# Altium PCB PCB1.PcbDoc (part 2 of 3)
Units mm, origin at the board's own origin, x right, y up, seen from the top; angles counter-clockwise.
Board outline 44.56 x 41.5 mm, 2 copper layers (Top Layer, Bottom Layer), stack 0.235 mm thick; 45 components, 47 nets, 215 pads, 58 vias.
Unrouted connection lines stored in the file: 2.
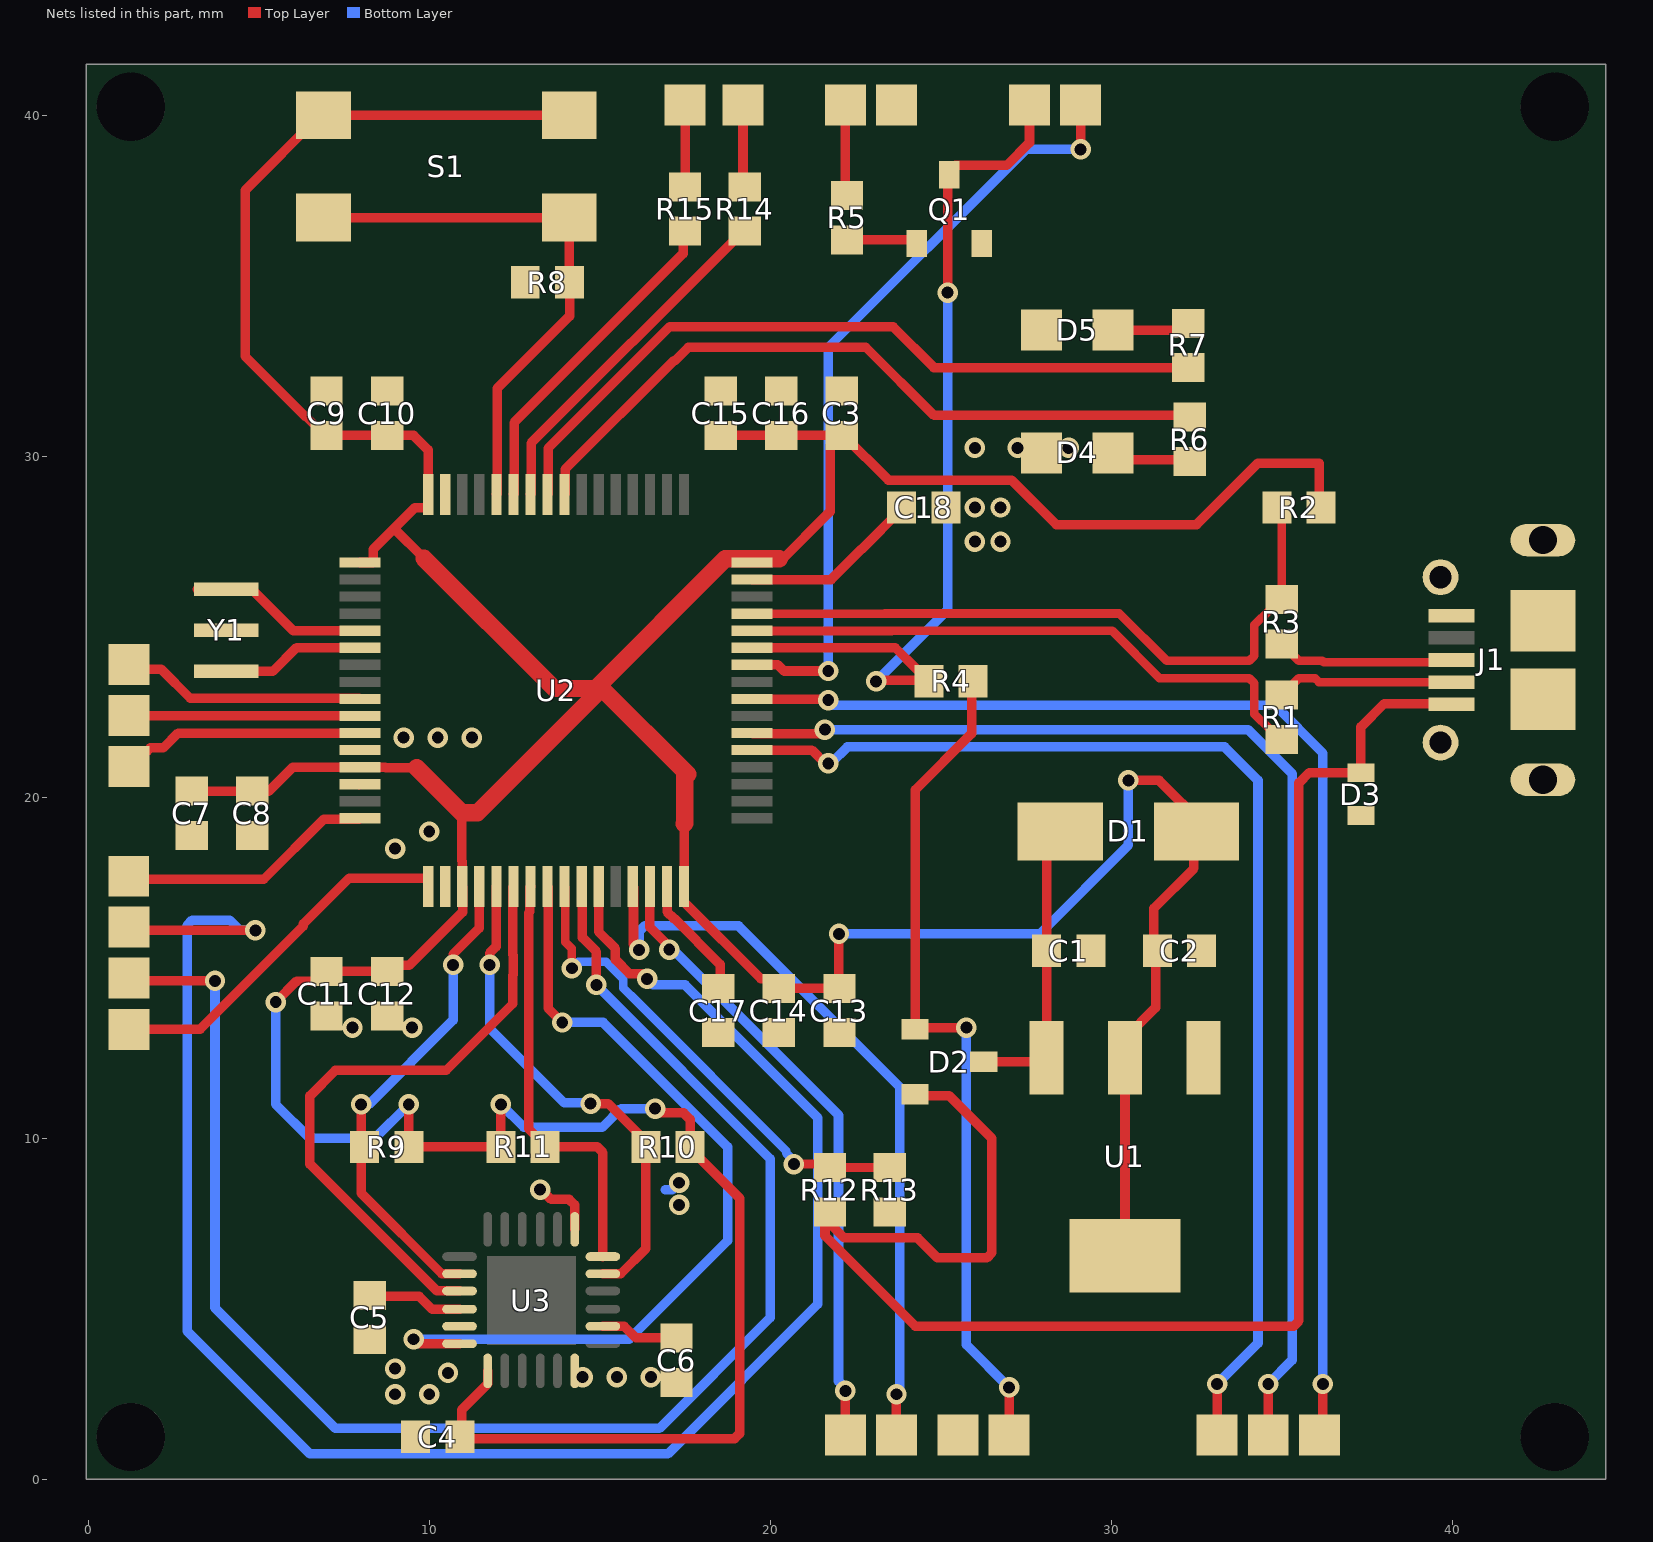
[diagram p2: the nets of this part, all layers, seen from the top]

## Part data
C1 C2 C9 C11 C13 C15: library part CC0603MRX5R7BB106, "10 µF ±20% 16V Ceramic Capacitor X5R 0603 (1608 Metric)", Capacitance=100nF, Case Code (Metric)=1608, Case Code (Imperial)=0603, Dielectric=X7R, Dielectric Material=Ceramic, Manufacturer=KEMET, Manufacturer Part Number=C0603C104K5RAC7411, Max Operating Temperature=125°C, Min Operating Temperature=-55°C, Package Quantity=15000, Supplier Part Number 1=399-7374-2-ND, Tolerance=10%, Voltage Rating=50V, Case/Package=0603, Category="Ceramic Capacitors", ComponentLink1Description=https://datasheet.ciiva.com/5424/kem-c1002-x7r-smd-5424426.pdf?src-supplier=Mouser, ComponentLink1URL=https://datasheet.ciiva.com/5424/kem-c1002-x7r-smd-5424426.pdf?src-supplier=Mouser, ComponentLink2Description=http://www.mouser.com/ds/2/447/Yageo_UPY-GP_NP0_16V-to-50V_9-358835.pdf?src-supplier=Mouser, ComponentLink2URL=http://www.mouser.com/ds/2/447/Yageo_UPY-GP_NP0_16V-to-50V_9-358835.pdf?src-supplier=Mouser, ComponentLink3Description=http://www.yageo.com/documents/recent/UPY-GPHC_X5R_4V-to-50V_25.pdf?src-supplier=Digi-Key, ComponentLink3URL=http://www.yageo.com/documents/recent/UPY-GPHC_X5R_4V-to-50V_25.pdf?src-supplier=Digi-Key, Depth=0.8mm, Dissipation Factor=2.5%, Halogen Free="Halogen Free", Height=0.8mm, Lead Free="Lead Free", Lead Pitch=0.7mm, Length=1.6mm, Mount="Surface Mount", Packaging="Tape and Reel", Pricing 1="15000=0,01540, 30000=0,01463, 75000=0,01309, 105000=0,01059, 150000=0,01024, 375000=0,00963 (USD)", Pricing 2="1=0,45000, 10=0,31500, 50=0,22080, 100=0,18930, 500=0,14194, 1000=0,11986 (USD)", Radiation Hardening=No, RoHS=Yes, RoHS Compliant=Yes, Stock 1=3300000, Stock 2=3575, Supplier 1=Digi-Key, Supplier 2=Digi-Key, Supplier Part Number 2=311-1822-1-ND, Termination=SMD/SMT, Thickness=0.035inch, Voltage Rating (DC)=50V, Weight=7.1E-05oz, Width=0.031inch
C3 C4 C5 C8 C10 C12 C14 C16 C17 C18: library part C0603C104K5RAC7411, "Cap Ceramic 0.1uF 50V X7R 10% SMD 0603 125°C Paper T/R 100nF", Case Code (Metric)=1608, Case Code (Imperial)=0603, Dielectric=X7R, Dielectric Material=Ceramic, Manufacturer=KEMET, Max Operating Temperature=125°C, Min Operating Temperature=-55°C, Package Quantity=15000, Supplier Part Number 1=399-7374-2-ND, Tolerance=10%, Voltage Rating=50V, Capacitance=100nF, Case/Package=0603, Category="Ceramic Capacitors", ComponentLink1Description=https://datasheet.ciiva.com/5424/kem-c1002-x7r-smd-5424426.pdf?src-supplier=Mouser, ComponentLink1URL=https://datasheet.ciiva.com/5424/kem-c1002-x7r-smd-5424426.pdf?src-supplier=Mouser, Depth=0.8mm, Dissipation Factor=2.5%, Height=0.8mm, Lead Pitch=0.7mm, Length=1.6mm, Manufacturer Part Number=C0603C104K5RAC7411, Mount="Surface Mount", Packaging="Tape and Reel", Pricing 1="15000=0,01540, 30000=0,01463, 75000=0,01309, 105000=0,01059, 150000=0,01024, 375000=0,00963 (USD)", Radiation Hardening=No, RoHS=Yes, Stock 1=3300000, Supplier 1=Digi-Key, Termination=SMD/SMT, Thickness=0.035inch, Voltage Rating (DC)=50V, Width=0.031inch
C6: library part 0603YC222KAT2A, "2200 pF ±10% 16V Ceramic Capacitor X7R 0603 (1608 Metric) 2.2nF", Capacitance=100nF, Case Code (Metric)=1608, Case Code (Imperial)=0603, Dielectric=X7R, Dielectric Material=Ceramic, Manufacturer=KEMET, Manufacturer Part Number=C0603C104K5RAC7411, Max Operating Temperature=125°C, Min Operating Temperature=-55°C, Package Quantity=15000, Supplier Part Number 1=399-7374-2-ND, Tolerance=10%, Voltage Rating=50V, Case/Package=0603, Category="Ceramic Capacitors", ComponentLink1Description=https://datasheet.ciiva.com/5424/kem-c1002-x7r-smd-5424426.pdf?src-supplier=Mouser, ComponentLink1URL=https://datasheet.ciiva.com/5424/kem-c1002-x7r-smd-5424426.pdf?src-supplier=Mouser, ComponentLink2Description=https://datasheet.ciiva.com/150/cx7r-150288.pdf?src-supplier=Digi-Key, ComponentLink2URL=https://datasheet.ciiva.com/150/cx7r-150288.pdf?src-supplier=Digi-Key, ComponentLink3Description=https://datasheet.ciiva.com/150/cx7r-150289.pdf?src-supplier=Digi-Key, ComponentLink3URL=https://datasheet.ciiva.com/150/cx7r-150289.pdf?src-supplier=Digi-Key, ComponentLink4Description=https://datasheet.ciiva.com/5412/cx7r-218113-5412506.pdf?src-supplier=Mouser, ComponentLink4URL=https://datasheet.ciiva.com/5412/cx7r-218113-5412506.pdf?src-supplier=Mouser, ComponentLink5Description=https://datasheet.ciiva.com/22682/1679506-22682859.pdf?src-supplier=Element14, ComponentLink5URL=https://datasheet.ciiva.com/22682/1679506-22682859.pdf?src-supplier=Element14, ComponentLink6Description=https://datasheet.ciiva.com/28546/1679506-28546235.pdf?src-supplier=Element14, ComponentLink6URL=https://datasheet.ciiva.com/28546/1679506-28546235.pdf?src-supplier=Element14, ComponentLink7Description=https://datasheet.ciiva.com/16199/cx7r-16199340.pdf?src-supplier=Future+Electronics, ComponentLink7URL=https://datasheet.ciiva.com/16199/cx7r-16199340.pdf?src-supplier=Future+Electronics, ComponentLink8Description=https://datasheet.ciiva.com/150/cx7r-150287.pdf?src-supplier=Digi-Key, ComponentLink8URL=https://datasheet.ciiva.com/150/cx7r-150287.pdf?src-supplier=Digi-Key, Construction=Flat, Contact Plating=Tin,Matte, Depth=0.8mm, Dissipation Factor=2.5%, Height=0.8mm, Lead Free="Lead Free", Lead Pitch=0.7mm, Length=1.6mm, Mount="Surface Mount", Number of Pins=2, Packaging="Tape and Reel", Pricing 1="15000=0,01540, 30000=0,01463, 75000=0,01309, 105000=0,01059, 150000=0,01024, 375000=0,00963 (USD)", Pricing 2="1=0,10000, 10=0,06500, 50=0,03560, 100=0,02910, 500=0,02080, 1000=0,01634 (USD)", Radiation Hardening=No, REACH SVHC="No SVHC", RoHS=Yes, RoHS Compliant=Yes, Series=-, Stock 1=3300000, Stock 2=82908, Supplier 1=Digi-Key, Supplier 2=Digi-Key, Supplier Part Number 2=478-6210-1-ND, Termination=SMD/SMT, Thickness=0.035inch, Voltage Rating (DC)=50V, Width=0.031inch
C7: library part CC0603MRX5R7BB105, "Cap Ceramic 1uF 16V X5R 20% Pad SMD 0603 85C Automotive T/R", Capacitance=100nF, Case Code (Metric)=1608, Case Code (Imperial)=0603, Dielectric=X7R, Dielectric Material=Ceramic, Manufacturer=KEMET, Manufacturer Part Number=C0603C104K5RAC7411, Max Operating Temperature=125°C, Min Operating Temperature=-55°C, Package Quantity=15000, Supplier Part Number 1=399-7374-2-ND, Tolerance=10%, Voltage Rating=50V, Case/Package=0603, Category="Ceramic Capacitors", ComponentLink1Description=https://datasheet.ciiva.com/5424/kem-c1002-x7r-smd-5424426.pdf?src-supplier=Mouser, ComponentLink1URL=https://datasheet.ciiva.com/5424/kem-c1002-x7r-smd-5424426.pdf?src-supplier=Mouser, ComponentLink2Description=http://www.mouser.com/ds/2/447/Yageo_UPY-GP_NP0_16V-to-50V_9-358835.pdf?src-supplier=Mouser, ComponentLink2URL=http://www.mouser.com/ds/2/447/Yageo_UPY-GP_NP0_16V-to-50V_9-358835.pdf?src-supplier=Mouser, ComponentLink3Description=http://www.yageo.com/documents/recent/UPY-GPHC_X5R_4V-to-50V_25.pdf?src-supplier=Digi-Key, ComponentLink3URL=http://www.yageo.com/documents/recent/UPY-GPHC_X5R_4V-to-50V_25.pdf?src-supplier=Digi-Key, ComponentLink4Description=http://www.mouser.com/ds/2/447/UPY-GPHC_X5R_4V-to-50V_25-1131599.pdf?src-supplier=Mouser, ComponentLink4URL=http://www.mouser.com/ds/2/447/UPY-GPHC_X5R_4V-to-50V_25-1131599.pdf?src-supplier=Mouser, ComponentLink5Description=http://www.yageo.com/exep/pages/download/literatures/ProductSelectionGuide%202014_Final_2.pdf?src-supplier=Digi-Key, ComponentLink5URL=http://www.yageo.com/exep/pages/download/literatures/ProductSelectionGuide%202014_Final_2.pdf?src-supplier=Digi-Key, Depth=0.8mm, Dissipation Factor=2.5%, Halogen Free="Halogen Free", Height=0.8mm, Lead Free="Lead Free", Lead Pitch=0.7mm, Length=1.6mm, Mount="Surface Mount", Packaging="Tape and Reel", Pricing 1="15000=0,01540, 30000=0,01463, 75000=0,01309, 105000=0,01059, 150000=0,01024, 375000=0,00963 (USD)", Pricing 2="1=0,45000, 10=0,31500, 50=0,22080, 100=0,18930, 500=0,14194, 1000=0,11986 (USD)", Pricing 3="1=0,11000, 10=0,08000, 50=0,04560, 100=0,03780, 500=0,02648, 1000=0,02191 (USD)", Radiation Hardening=No, Resistor Type=Ceramic, RoHS=Yes, RoHS Compliant=Yes, Series=CC, Stock 1=3300000, Stock 2=3575, Stock 3=9457, Supplier 1=Digi-Key, Supplier 2=Digi-Key, Supplier 3=Digi-Key, Supplier Part Number 2=311-1822-1-ND, Supplier Part Number 3=311-1821-1-ND, Termination=SMD/SMT, Thickness=0.035inch, Voltage Rating (DC)=50V, Weight=7.1E-05oz, Width=0.031inch
D1: "VR=50V IF=1A 10pF Trr=3us", Average Rectified Current=1A, Capacitance=10pF, Case/Package=SMA, Forward Voltage=1.1V, Manufacturer=Diodes, Manufacturer Part Number=S1A-13-F, Max Forward Surge Current (Ifsm)=30A, Max Operating Temperature=150°C, Max Repetitive Reverse Voltage (Vrrm)=50V, Max Reverse Current=5uA, Min Operating Temperature=-65°C, Package Quantity=5000, Supplier Part Number 1=S1A-FDICT-ND, Category="Rectifier Diodes", ComponentLink1Description=https://datasheet.ciiva.com/911/ds16003-911872.pdf?src-supplier=Digi-Key, ComponentLink1URL=https://datasheet.ciiva.com/911/ds16003-911872.pdf?src-supplier=Digi-Key, ComponentLink2Description=https://datasheet.ciiva.com/27052/1541520-27052419.pdf?src-supplier=Jameco, ComponentLink2URL=https://datasheet.ciiva.com/27052/1541520-27052419.pdf?src-supplier=Jameco, ComponentLink3Description=https://datasheet.ciiva.com/8301/ds16003-8301429.pdf?src-supplier=Avnet, ComponentLink3URL=https://datasheet.ciiva.com/8301/ds16003-8301429.pdf?src-supplier=Avnet, ComponentLink4Description=https://datasheet.ciiva.com/22695/1911706-22695830.pdf?src-supplier=Element14, ComponentLink4URL=https://datasheet.ciiva.com/22695/1911706-22695830.pdf?src-supplier=Element14, ComponentLink5Description=https://datasheet.ciiva.com/4453/ds16003-83672-4453580.pdf?src-supplier=Mouser, ComponentLink5URL=https://datasheet.ciiva.com/4453/ds16003-83672-4453580.pdf?src-supplier=Mouser, ComponentLink6Description=https://datasheet.ciiva.com/16199/ds16003-16199336.pdf?src-supplier=Future+Electronics, ComponentLink6URL=https://datasheet.ciiva.com/16199/ds16003-16199336.pdf?src-supplier=Future+Electronics, ComponentLink7Description=https://datasheet.ciiva.com/25953/ds16003-25953033.pdf?src-supplier=Avnet+Europe, ComponentLink7URL=https://datasheet.ciiva.com/25953/ds16003-25953033.pdf?src-supplier=Avnet+Europe, Current Rating=1A, Element Configuration=Single, Forward Current=1A, Height=2.1mm, Lead Free="Lead Free", Length=4.6mm, Max Reverse Voltage (DC)=50V, Max Surge Current=30A, Mount="Surface Mount", Number of Pins=2, Output Current=1A, Packaging="Tape and Reel", Peak Non-Repetitive Surge Current=30A, Polarity=Standard, Pricing 1="1=0,27000, 10=0,22300, 100=0,11850, 500=0,07796, 1000=0,05301, 2000=0,04782 (USD)", Radiation Hardening=No, REACH SVHC="No SVHC", Recovery Time=1.8us, Reverse Recovery Time=3us, Reverse Voltage (DC)=50V, RoHS=Yes, RoHS Compliant=Yes, Series=-, Stock 1=971381, Supplier 1=Digi-Key, Termination=SMD/SMT, Voltage Rating (DC)=50V, Weight=0.002258oz, Width=2.92mm
D2: "Diode Array 1 Pair Common Cathode Schottky 30V 200mA Surface Mount TO-236-3, SC-59, SOT-23-3", Package="SOT-23-3 ON Semiconductor", Availability=Unavailable, MF="ON Semiconductor", MP=BAT54C, Price=None, SnapEDA_Link=https://www.snapeda.com/parts/BAT54C/ON%20Semiconductor/view-part/1985258/?ref=snap
D3: "ESDA Series 6.4 V 700 W SMT Uni-Directional TVS Diode - 1610", Case/Package=1610, Clamping Voltage=11.6V, Manufacturer=STMicroelectronics, Max Breakdown Voltage=7.2V, Max Operating Temperature=150°C, Min Breakdown Voltage=6.4V, Min Operating Temperature=-55°C, Peak Pulse Current=60A, Peak Pulse Power=700W, Power Line Protection=No, Resistor Type=Zener, Reverse Standoff Voltage=5V, Supplier Part Number 1=497-16253-1-ND, Category="TVS Diodes", ComponentLink1Description=http://www.farnell.com/datasheets/2041290.pdf?src-supplier=Farnell, ComponentLink1URL=http://www.farnell.com/datasheets/2041290.pdf?src-supplier=Farnell, ComponentLink2Description=http://www.st.com/content/ccc/resource/technical/document/datasheet/44/e9/26/44/42/ee/4f/e5/DM00139972.pdf/files/DM00139972.pdf/jcr:content/translations/en.DM00139972.pdf?src-supplier=Digi-Key, ComponentLink2URL=http://www.st.com/content/ccc/resource/technical/document/datasheet/44/e9/26/44/42/ee/4f/e5/DM00139972.pdf/files/DM00139972.pdf/jcr:content/translations/en.DM00139972.pdf?src-supplier=Digi-Key, ComponentLink3Description=http://www.farnell.com/datasheets/2041290.pdf?src-supplier=Element14, ComponentLink3URL=http://www.farnell.com/datasheets/2041290.pdf?src-supplier=Element14, Manufacturer Part Number=ESDA7P60-1U1M, Mount="Surface Mount", Number of Pins=2, Number of Unidirectional Channels=1, Packaging="Cut Tape", Polarity=Unidirectional, Pricing 1="1=0,51000, 10=0,38400, 100=0,23910, 500=0,16360, 1000=0,12584, 2000=0,11326 (USD)", REACH SVHC="No SVHC", RoHS=Yes, RoHS Compliant=Yes, Stock 1=12994, Supplier 1=Digi-Key
D4 D5: "Led SMT Red 0805 Tape", Case Code (Metric)=2012, Case Code (Imperial)=0805, Color=Red, Forward Current=25mA, Forward Voltage=2.5V, Lens Color=White, Manufacturer="Osram Opto", Manufacturer Part Number=LSR976-NR-1, Max Operating Temperature=85°C, Min Operating Temperature=-30°C, Package Quantity=16000, Power Dissipation=65mW, Reverse Voltage=12V, Supplier Part Number 1=475-1278-1-ND, Test Current=20mA, Case/Package=0805, Category=LEDs, ComponentLink1Description=https://datasheet.ciiva.com/4688/o-ls-ly-r976-24152-4688435.pdf?src-supplier=Mouser, ComponentLink1URL=https://datasheet.ciiva.com/4688/o-ls-ly-r976-24152-4688435.pdf?src-supplier=Mouser, ComponentLink2Description=https://datasheet.ciiva.com/26920/getdatasheetpartid-568367-26920831.pdf?src-supplier=Verical, ComponentLink2URL=https://datasheet.ciiva.com/26920/getdatasheetpartid-568367-26920831.pdf?src-supplier=Verical, ComponentLink3Description=https://datasheet.ciiva.com/2112/00078896-0-2112782.pdf?src-supplier=Digi-Key, ComponentLink3URL=https://datasheet.ciiva.com/2112/00078896-0-2112782.pdf?src-supplier=Digi-Key, ComponentLink4Description=https://datasheet.ciiva.com/2112/00078896-0-2112781.pdf?src-supplier=Digi-Key, ComponentLink4URL=https://datasheet.ciiva.com/2112/00078896-0-2112781.pdf?src-supplier=Digi-Key, ComponentLink5Description=https://datasheet.ciiva.com/2112/00078896-0-2112783.pdf?src-supplier=Digi-Key, ComponentLink5URL=https://datasheet.ciiva.com/2112/00078896-0-2112783.pdf?src-supplier=Digi-Key, Depth=1.35mm, Dominant Wavelength=633nm, Height=0.9mm, Length=2.1mm, Lens Size=1.25mm, Lens Style=Flat,Diffused,Colorless,Rectangular, Lens Transparency=Diffused, Luminous Flux=0.47lm, Luminous Intensity=180mcd, Mount="Surface Mount", Number of Elements=1, Number of LEDs=1, Number of Pins=2, Packaging="Tape and Reel", Pricing 1="1=0,31000, 10=0,16700, 100=0,07750, 500=0,07152, 1000=0,05602, 2000=0,05483 (USD)", Radiation Hardening=No, RoHS=Yes, RoHS Compliant=Yes, Series="CHIPLED 0805", Stock 1=165904, Supplier 1=Digi-Key, Viewing Angle=160°, Width=1.25mm, Illumination Color=Red
J1: "Conn Micro USB 2.0 Type B RCP 5 POS 0.65mm Solder RA SMD 5 Terminal 1 Port Embossed T/R", Package="FakePackage u", Availability=Unavailable, MF=Hirose, MP=ZX62D-B-5P8, Price=None, SnapEDA_Link=https://www.snapeda.com/parts/ZX62D-B-5P8/Hirose%20Electric%20Co%20Ltd/view-part/46842/?ref=snap
Q1: "General Purpose Transistor, PNP Silicon, 3-Pin SOT-23, Pb-Free, Tape and Reel", Manufacturer="On Semiconductor", ComponentLink1Description="Manufacturer URL", ComponentLink1URL=http://www.onsemi.com/, ComponentLink2Description=Datasheet, ComponentLink2URL=http://www.onsemi.cn/pub_link/Collateral/BC856ALT1-D.PDF, ComponentLink3Description="Package Specification", ComponentLink3URL=http://www.onsemi.cn/pub_link/Collateral/318-08.PDF, DatasheetVersion="Rev. 13", fT Min (MHz)=100, Mounting Technology="Surface Mount", PackageDescription="3-Pin Small Outline Transistor, Body 2.92 x 1.3 mm, Pitch 0.95 mm", PackageReference=SOT-23-3-318-08, PackageVersion="Rev. AP, 11/2009", Packing="Tape and Reel", PartNumber=BC857BLT3G, Polarity=PNP, RoHS=TRUE, IC Continuous (A)=-0.1
R1 R3: library part RC0603JR-0722RL, "22 Ohms ±5% 0.1W, 1/10W Chip Resistor 0603 (1608 Metric) Moisture Resistant Thick Film", Case Code (Metric)=1005, Case Code (Imperial)=0402, Manufacturer=Yageo, Manufacturer Part Number=RC0402JR-071K2L, Max Operating Temperature=155°C, Max Power Dissipation=63mW, Min Operating Temperature=-55°C, Package Quantity=1, Power Rating=62.5mW, Resistance=1.2kR, Resistance Tolerance=5%, Resistor Type="Thick Film", Supplier Part Number 1=311-1.2KGRCT-ND, Temperature Coefficient=100ppm/°C, Voltage Rating=50V, Case/Package=0402, Category="Chip SMD Resistors", ComponentLink1Description=https://datasheet.ciiva.com/7983/1018594-7983557.pdf?src-supplier=Element14, ComponentLink1URL=https://datasheet.ciiva.com/7983/1018594-7983557.pdf?src-supplier=Element14, ComponentLink2Description=https://datasheet.ciiva.com/12558/pyu-rc0402-51-rohs-l-6-r-8721-12558349.pdf?src-supplier=Mouser, ComponentLink2URL=https://datasheet.ciiva.com/12558/pyu-rc0402-51-rohs-l-6-r-8721-12558349.pdf?src-supplier=Mouser, ComponentLink3Description=https://datasheet.ciiva.com/7850/1018594-7850165.pdf?src-supplier=Element14, ComponentLink3URL=https://datasheet.ciiva.com/7850/1018594-7850165.pdf?src-supplier=Element14, ComponentLink4Description=https://datasheet.ciiva.com/15189/getdatasheetpartid-325064-15189548.pdf?src-supplier=Verical, ComponentLink4URL=https://datasheet.ciiva.com/15189/getdatasheetpartid-325064-15189548.pdf?src-supplier=Verical, ComponentLink5Description=https://datasheet.ciiva.com/17068/pyu-rc0402-51-rohs-l-6-r-17068326.pdf?src-supplier=Future+Electronics, ComponentLink5URL=https://datasheet.ciiva.com/17068/pyu-rc0402-51-rohs-l-6-r-17068326.pdf?src-supplier=Future+Electronics, ComponentLink6Description=https://datasheet.ciiva.com/2452/pyu-r-int-thick-7-2452873.pdf?src-supplier=Digi-Key, ComponentLink6URL=https://datasheet.ciiva.com/2452/pyu-r-int-thick-7-2452873.pdf?src-supplier=Digi-Key, ComponentLink7Description=https://datasheet.ciiva.com/2452/pyu-r-int-thick-7-2452874.pdf?src-supplier=Digi-Key, ComponentLink7URL=https://datasheet.ciiva.com/2452/pyu-r-int-thick-7-2452874.pdf?src-supplier=Digi-Key, ComponentLink8Description=https://datasheet.ciiva.com/2452/pyu-r-int-thick-7-2452872.pdf?src-supplier=Digi-Key, ComponentLink8URL=https://datasheet.ciiva.com/2452/pyu-r-int-thick-7-2452872.pdf?src-supplier=Digi-Key, ComponentLink9Description=https://datasheet.ciiva.com/7746/443971-7746456.pdf?src-supplier=Element14, ComponentLink9URL=https://datasheet.ciiva.com/7746/443971-7746456.pdf?src-supplier=Element14, ComponentLink10Description=https://datasheet.ciiva.com/7746/443971-7746455.pdf?src-supplier=Element14, ComponentLink10URL=https://datasheet.ciiva.com/7746/443971-7746455.pdf?src-supplier=Element14, ComponentLink11Description=https://datasheet.ciiva.com/22643/443971-22643423.pdf?src-supplier=Element14, ComponentLink11URL=https://datasheet.ciiva.com/22643/443971-22643423.pdf?src-supplier=Element14, ComponentLink12Description=https://datasheet.ciiva.com/46394/443971-46394999.pdf?src-supplier=Element14, ComponentLink12URL=https://datasheet.ciiva.com/46394/443971-46394999.pdf?src-supplier=Element14, ComponentLink13Description=https://datasheet.ciiva.com/7746/443971-7746471.pdf?src-supplier=Element14, ComponentLink13URL=https://datasheet.ciiva.com/7746/443971-7746471.pdf?src-supplier=Element14, ComponentLink14Description=https://datasheet.ciiva.com/7746/443971-7746472.pdf?src-supplier=Element14, ComponentLink14URL=https://datasheet.ciiva.com/7746/443971-7746472.pdf?src-supplier=Element14, ComponentLink15Description=https://datasheet.ciiva.com/15189/getdatasheetpartid-493085-15189862.pdf?src-supplier=Verical, ComponentLink15URL=https://datasheet.ciiva.com/15189/getdatasheetpartid-493085-15189862.pdf?src-supplier=Verical, Construction=Rectangular, Contact Plating=Tin,Lead,Matte, Depth=0.5mm, Features="Moisture Resistant", Height=0.35mm, Lead Free="Lead Free", Length=1mm, Military Standard=Not, Number of Pins=2, Number of Terminations=2, Packaging="Tape and Reel", Pricing 1="1=0,10000, 10=0,01300, 100=0,00540, 1000=0,00244, 2500=0,00212, 5000=0,00175 (USD)", Pricing 2="1=0,10000, 10=0,02000, 100=0,00800, 1000=0,00360, 2500=0,00312, 5000=0,00258 (USD)", Pricing 3="1=0,10000, 10=0,02000, 100=0,00800, 1000=0,00360, 2500=0,00312 (USD)", Radiation Hardening=No, REACH SVHC="No SVHC", RoHS=Yes, RoHS Compliant=Yes, Series=RC, Size Code=0402, Stock 1=52843, Stock 2=41751, Stock 3=810575, Supplier 1=Digi-Key, Supplier 2=Digi-Key, Supplier 3=Digi-Key, Supplier Part Number 2=13-RC0603JR-131KLCT-ND, Supplier Part Number 3=311-22GRCT-ND, Termination=SMD/SMT, Tolerance=5%, Voltage Rating (DC)=50V, Width=0.5mm
R2: library part RC0603FR-071K5L, "1500Ω ± 1.00% 0.1W ± 100ppm/℃ 0603", Case Code (Metric)=1608, Case Code (Imperial)=0603, Manufacturer=Yageo, Manufacturer Part Number=RC0603FR-0710KL, Max Operating Temperature=155°C, Max Power Dissipation=100mW, Min Operating Temperature=-55°C, Package Quantity=1, Resistance=10kR, Resistance Tolerance=1%, Resistor Type="Thick Film", Supplier Part Number 1=311-10.0KHRCT-ND, Temperature Coefficient=100ppm/°C, Voltage Rating=75V, Voltage Rating (DC)=50V, Case/Package=0603, Category="Chip SMD Resistors", ComponentLink1Description=https://datasheet.ciiva.com/7660/38590-7660789.pdf?src-supplier=Element14, ComponentLink1URL=https://datasheet.ciiva.com/7660/38590-7660789.pdf?src-supplier=Element14, ComponentLink2Description=https://datasheet.ciiva.com/7983/443971-7983596.pdf?src-supplier=Element14, ComponentLink2URL=https://datasheet.ciiva.com/7983/443971-7983596.pdf?src-supplier=Element14, ComponentLink3Description=https://datasheet.ciiva.com/22747/443971-22747519.pdf?src-supplier=Element14, ComponentLink3URL=https://datasheet.ciiva.com/22747/443971-22747519.pdf?src-supplier=Element14, ComponentLink4Description=https://datasheet.ciiva.com/46440/1868787-46440891.pdf?src-supplier=Element14, ComponentLink4URL=https://datasheet.ciiva.com/46440/1868787-46440891.pdf?src-supplier=Element14, ComponentLink5Description=https://datasheet.ciiva.com/7746/1738695-7746239.pdf?src-supplier=Element14, ComponentLink5URL=https://datasheet.ciiva.com/7746/1738695-7746239.pdf?src-supplier=Element14, ComponentLink6Description=https://datasheet.ciiva.com/15189/getdatasheetpartid-409289-15189591.pdf?src-supplier=Verical, ComponentLink6URL=https://datasheet.ciiva.com/15189/getdatasheetpartid-409289-15189591.pdf?src-supplier=Verical, Construction=Rectangular, Depth=0.8mm, Features="Moisture Resistant", Height=0.45mm, Lead Free="Lead Free", Lead Pitch=0.3mm, Length=1.6mm, Military Standard=Not, Number of Pins=2, Number of Terminations=2, Packaging="Tape and Reel", Power Rating=100mW, Pricing 1="1=0,10000, 10=0,02400, 100=0,00970, 1000=0,00436, 2500=0,00378 (USD)", Pricing 2="1=0,10000, 10=0,02400, 100=0,00970, 1000=0,00436, 2500=0,00378 (USD)", REACH SVHC=Unknown, RoHS=Yes, RoHS Compliant=Yes, Series=RC, Size Code=0603, Stock 1=28996893, Stock 2=3859269, Supplier 1=Digi-Key, Supplier 2=Digi-Key, Termination=SMD/SMT, Tolerance=1%, Weight=7.1E-05oz, Width=0.8mm
R4 R8 R9 R10 R11 R12 R13 R14 R15: library part RC0603FR-0710KL, "10 kOhms ±1% 0.1W, 1/10W Chip Resistor 0603 (1608 Metric) Moisture Resistant Thick Film", Case Code (Metric)=1608, Case Code (Imperial)=0603, Manufacturer=Yageo, Max Operating Temperature=155°C, Max Power Dissipation=100mW, Min Operating Temperature=-55°C, Resistance=10kR, Resistance Tolerance=1%, Resistor Type="Thick Film", Supplier Part Number 1=311-10.0KHRCT-ND, Temperature Coefficient=100ppm/°C, Voltage Rating=75V, Voltage Rating (DC)=50V, Case/Package=0603, Category="Chip SMD Resistors", ComponentLink1Description=https://datasheet.ciiva.com/7660/38590-7660789.pdf?src-supplier=Element14, ComponentLink1URL=https://datasheet.ciiva.com/7660/38590-7660789.pdf?src-supplier=Element14, ComponentLink2Description=https://datasheet.ciiva.com/7983/443971-7983596.pdf?src-supplier=Element14, ComponentLink2URL=https://datasheet.ciiva.com/7983/443971-7983596.pdf?src-supplier=Element14, ComponentLink3Description=https://datasheet.ciiva.com/22747/443971-22747519.pdf?src-supplier=Element14, ComponentLink3URL=https://datasheet.ciiva.com/22747/443971-22747519.pdf?src-supplier=Element14, ComponentLink4Description=https://datasheet.ciiva.com/46440/1868787-46440891.pdf?src-supplier=Element14, ComponentLink4URL=https://datasheet.ciiva.com/46440/1868787-46440891.pdf?src-supplier=Element14, ComponentLink5Description=https://datasheet.ciiva.com/7746/1738695-7746239.pdf?src-supplier=Element14, ComponentLink5URL=https://datasheet.ciiva.com/7746/1738695-7746239.pdf?src-supplier=Element14, ComponentLink6Description=https://datasheet.ciiva.com/15189/getdatasheetpartid-409289-15189591.pdf?src-supplier=Verical, ComponentLink6URL=https://datasheet.ciiva.com/15189/getdatasheetpartid-409289-15189591.pdf?src-supplier=Verical, Construction=Rectangular, Depth=0.8mm, Features="Moisture Resistant", Height=0.45mm, Lead Free="Lead Free", Lead Pitch=0.3mm, Length=1.6mm, Manufacturer Part Number=RC0603FR-0710KL, Military Standard=Not, Number of Pins=2, Number of Terminations=2, Packaging="Tape and Reel", Power Rating=100mW, Pricing 1="1=0,10000, 10=0,02400, 100=0,00970, 1000=0,00436, 2500=0,00378 (USD)", REACH SVHC=Unknown, RoHS=Yes, RoHS Compliant=Yes, Series=RC, Size Code=0603, Stock 1=28996893, Supplier 1=Digi-Key, Termination=SMD/SMT, Tolerance=1%, Weight=7.1E-05oz, Width=0.8mm
R5: library part RC0603FR-074K7L, "4.7 kOhms ±1% 0.1W, 1/10W Chip Resistor 0603 (1608 Metric) Moisture Resistant Thick Film", Case Code (Metric)=1608, Case Code (Imperial)=0603, Manufacturer=Yageo, Manufacturer Part Number=RC0603FR-0710KL, Max Operating Temperature=155°C, Max Power Dissipation=100mW, Min Operating Temperature=-55°C, Resistance=10kR, Resistance Tolerance=1%, Resistor Type="Thick Film", Supplier Part Number 1=311-10.0KHRCT-ND, Temperature Coefficient=100ppm/°C, Voltage Rating=75V, Voltage Rating (DC)=50V, Case/Package=0603, Category="Chip SMD Resistors", ComponentLink1Description=https://datasheet.ciiva.com/7660/38590-7660789.pdf?src-supplier=Element14, ComponentLink1URL=https://datasheet.ciiva.com/7660/38590-7660789.pdf?src-supplier=Element14, ComponentLink2Description=https://datasheet.ciiva.com/7983/443971-7983596.pdf?src-supplier=Element14, ComponentLink2URL=https://datasheet.ciiva.com/7983/443971-7983596.pdf?src-supplier=Element14, ComponentLink3Description=https://datasheet.ciiva.com/22747/443971-22747519.pdf?src-supplier=Element14, ComponentLink3URL=https://datasheet.ciiva.com/22747/443971-22747519.pdf?src-supplier=Element14, ComponentLink4Description=https://datasheet.ciiva.com/46440/1868787-46440891.pdf?src-supplier=Element14, ComponentLink4URL=https://datasheet.ciiva.com/46440/1868787-46440891.pdf?src-supplier=Element14, ComponentLink5Description=https://datasheet.ciiva.com/7746/1738695-7746239.pdf?src-supplier=Element14, ComponentLink5URL=https://datasheet.ciiva.com/7746/1738695-7746239.pdf?src-supplier=Element14, ComponentLink6Description=https://datasheet.ciiva.com/15189/getdatasheetpartid-409289-15189591.pdf?src-supplier=Verical, ComponentLink6URL=https://datasheet.ciiva.com/15189/getdatasheetpartid-409289-15189591.pdf?src-supplier=Verical, ComponentLink7Description=https://datasheet.ciiva.com/15189/getdatasheetpartid-422754-15189760.pdf?src-supplier=Verical, ComponentLink7URL=https://datasheet.ciiva.com/15189/getdatasheetpartid-422754-15189760.pdf?src-supplier=Verical, ComponentLink8Description=https://datasheet.ciiva.com/7660/38590-7660794.pdf?src-supplier=Element14, ComponentLink8URL=https://datasheet.ciiva.com/7660/38590-7660794.pdf?src-supplier=Element14, ComponentLink9Description=https://datasheet.ciiva.com/22747/443971-22747528.pdf?src-supplier=Element14, ComponentLink9URL=https://datasheet.ciiva.com/22747/443971-22747528.pdf?src-supplier=Element14, ComponentLink10Description=https://datasheet.ciiva.com/46440/1868787-46440909.pdf?src-supplier=Element14, ComponentLink10URL=https://datasheet.ciiva.com/46440/1868787-46440909.pdf?src-supplier=Element14, ComponentLink11Description=https://datasheet.ciiva.com/7746/1868787-7746365.pdf?src-supplier=Element14, ComponentLink11URL=https://datasheet.ciiva.com/7746/1868787-7746365.pdf?src-supplier=Element14, ComponentLink12Description=https://datasheet.ciiva.com/7746/1738695-7746366.pdf?src-supplier=Element14, ComponentLink12URL=https://datasheet.ciiva.com/7746/1738695-7746366.pdf?src-supplier=Element14, Construction=Rectangular, Depth=0.8mm, Features="Moisture Resistant", Height=0.45mm, Lead Free="Lead Free", Lead Pitch=0.3mm, Length=1.6mm, Military Standard=Not, Number of Pins=2, Number of Terminations=2, Packaging="Tape and Reel", Power Rating=100mW, Pricing 1="1=0,10000, 10=0,02400, 100=0,00970, 1000=0,00436, 2500=0,00378 (USD)", Pricing 2="1=0,10000, 10=0,02400, 100=0,00970, 1000=0,00436, 2500=0,00378 (USD)", REACH SVHC=Unknown, RoHS=Yes, RoHS Compliant=Yes, Series=RC, Size Code=0603, Stock 1=28996893, Stock 2=20570870, Supplier 1=Digi-Key, Supplier 2=Digi-Key, Supplier Part Number 2=311-4.70KHRCT-ND, Termination=SMD/SMT, Tolerance=1%, Weight=7.1E-05oz, Width=0.8mm
R6 R7: library part RC0603JR-0722RL_1, "47Ω ± 5.00% 0.1W ± 100ppm/℃ 0603", Case Code (Metric)=1005, Case Code (Imperial)=0402, Manufacturer=Yageo, Manufacturer Part Number=RC0402JR-071K2L, Max Operating Temperature=155°C, Max Power Dissipation=63mW, Min Operating Temperature=-55°C, Package Quantity=1, Power Rating=62.5mW, Resistance=47R, Resistance Tolerance=5%, Resistor Type="Thick Film", Supplier Part Number 1=311-1.2KGRCT-ND, Temperature Coefficient=100ppm/°C, Voltage Rating=50V, Case/Package=0402, Category="Chip SMD Resistors", ComponentLink1Description=https://datasheet.ciiva.com/7983/1018594-7983557.pdf?src-supplier=Element14, ComponentLink1URL=https://datasheet.ciiva.com/7983/1018594-7983557.pdf?src-supplier=Element14, ComponentLink2Description=https://datasheet.ciiva.com/12558/pyu-rc0402-51-rohs-l-6-r-8721-12558349.pdf?src-supplier=Mouser, ComponentLink2URL=https://datasheet.ciiva.com/12558/pyu-rc0402-51-rohs-l-6-r-8721-12558349.pdf?src-supplier=Mouser, ComponentLink3Description=https://datasheet.ciiva.com/7850/1018594-7850165.pdf?src-supplier=Element14, ComponentLink3URL=https://datasheet.ciiva.com/7850/1018594-7850165.pdf?src-supplier=Element14, ComponentLink4Description=https://datasheet.ciiva.com/15189/getdatasheetpartid-325064-15189548.pdf?src-supplier=Verical, ComponentLink4URL=https://datasheet.ciiva.com/15189/getdatasheetpartid-325064-15189548.pdf?src-supplier=Verical, ComponentLink5Description=https://datasheet.ciiva.com/17068/pyu-rc0402-51-rohs-l-6-r-17068326.pdf?src-supplier=Future+Electronics, ComponentLink5URL=https://datasheet.ciiva.com/17068/pyu-rc0402-51-rohs-l-6-r-17068326.pdf?src-supplier=Future+Electronics, ComponentLink6Description=https://datasheet.ciiva.com/2452/pyu-r-int-thick-7-2452873.pdf?src-supplier=Digi-Key, ComponentLink6URL=https://datasheet.ciiva.com/2452/pyu-r-int-thick-7-2452873.pdf?src-supplier=Digi-Key, ComponentLink7Description=https://datasheet.ciiva.com/2452/pyu-r-int-thick-7-2452874.pdf?src-supplier=Digi-Key, ComponentLink7URL=https://datasheet.ciiva.com/2452/pyu-r-int-thick-7-2452874.pdf?src-supplier=Digi-Key, ComponentLink8Description=https://datasheet.ciiva.com/2452/pyu-r-int-thick-7-2452872.pdf?src-supplier=Digi-Key, ComponentLink8URL=https://datasheet.ciiva.com/2452/pyu-r-int-thick-7-2452872.pdf?src-supplier=Digi-Key, ComponentLink9Description=https://datasheet.ciiva.com/7746/443971-7746456.pdf?src-supplier=Element14, ComponentLink9URL=https://datasheet.ciiva.com/7746/443971-7746456.pdf?src-supplier=Element14, ComponentLink10Description=https://datasheet.ciiva.com/7746/443971-7746455.pdf?src-supplier=Element14, ComponentLink10URL=https://datasheet.ciiva.com/7746/443971-7746455.pdf?src-supplier=Element14, ComponentLink11Description=https://datasheet.ciiva.com/22643/443971-22643423.pdf?src-supplier=Element14, ComponentLink11URL=https://datasheet.ciiva.com/22643/443971-22643423.pdf?src-supplier=Element14, ComponentLink12Description=https://datasheet.ciiva.com/46394/443971-46394999.pdf?src-supplier=Element14, ComponentLink12URL=https://datasheet.ciiva.com/46394/443971-46394999.pdf?src-supplier=Element14, ComponentLink13Description=https://datasheet.ciiva.com/7746/443971-7746471.pdf?src-supplier=Element14, ComponentLink13URL=https://datasheet.ciiva.com/7746/443971-7746471.pdf?src-supplier=Element14, ComponentLink14Description=https://datasheet.ciiva.com/7746/443971-7746472.pdf?src-supplier=Element14, ComponentLink14URL=https://datasheet.ciiva.com/7746/443971-7746472.pdf?src-supplier=Element14, ComponentLink15Description=https://datasheet.ciiva.com/15189/getdatasheetpartid-493085-15189862.pdf?src-supplier=Verical, ComponentLink15URL=https://datasheet.ciiva.com/15189/getdatasheetpartid-493085-15189862.pdf?src-supplier=Verical, ComponentLink16Description=https://datasheet.ciiva.com/46395/443971-46395079.pdf?src-supplier=Element14, ComponentLink16URL=https://datasheet.ciiva.com/46395/443971-46395079.pdf?src-supplier=Element14, ComponentLink17Description=https://datasheet.ciiva.com/7746/443971-7746511.pdf?src-supplier=Element14, ComponentLink17URL=https://datasheet.ciiva.com/7746/443971-7746511.pdf?src-supplier=Element14, Construction=Rectangular, Contact Plating=Tin,Lead,Matte, Depth=0.5mm, Features="Moisture Resistant", Height=0.35mm, Lead Free="Lead Free", Length=1mm, Military Standard=Not, Number of Pins=2, Number of Terminations=2, Packaging="Tape and Reel", Pricing 1="1=0,10000, 10=0,01300, 100=0,00540, 1000=0,00244, 2500=0,00212, 5000=0,00175 (USD)", Pricing 2="1=0,10000, 10=0,02000, 100=0,00800, 1000=0,00360, 2500=0,00312, 5000=0,00258 (USD)", Pricing 3="1=0,10000, 10=0,02000, 100=0,00800, 1000=0,00360, 2500=0,00312 (USD)", Pricing 4="1=0,10000, 10=0,02000, 100=0,00800, 1000=0,00360, 2500=0,00312 (USD)", Radiation Hardening=No, REACH SVHC="No SVHC", RoHS=Yes, RoHS Compliant=Yes, Series=RC, Size Code=0402, Stock 1=52843, Stock 2=41751, Stock 3=810575, Stock 4=380901, Supplier 1=Digi-Key, Supplier 2=Digi-Key, Supplier 3=Digi-Key, Supplier 4=Digi-Key, Supplier Part Number 2=13-RC0603JR-131KLCT-ND, Supplier Part Number 3=311-22GRCT-ND, Supplier Part Number 4=311-47GRDKR-ND, Termination=SMD/SMT, Tolerance=5%, Voltage Rating (DC)=50V, Width=0.5mm
S1: "Switch", Manufacturer_Name=E-Switch, Mouser Part Number=612-TL3305BF260QG, Datasheet Link=https://sten-eswitch-13110800-production.s3.amazonaws.com/system/asset/product_line/data_sheet/213/TL3305.pdf, Height=5mm, Manufacturer_Part_Number=TL3305BF260QG, Mouser Price/Stock=https://www.mouser.co.uk/ProductDetail/E-Switch/TL3305BF260QG?qs=UrFqKgNWc7Tq35XCdypyiw%3D%3D
U1: "Linear Voltage Regulator IC 1 Output 1A SOT-223", Package="TO-261-4 HTC Korea", Availability=Unavailable, MF="ON Semiconductor", MP=NCP1117ST33T3G, Price=None, SnapEDA_Link=https://www.snapeda.com/parts/NCP1117ST33T3G/ON%20Semiconductor/view-part/802519/?ref=snap
U2: "ARMÂ® CortexÂ®-M4 STM32F4 Microcontroller IC 32-Bit 168MHz 1MB _1M x 8_ FLASH 64-LQFP _10x10_", Package="LQFP-64 STMicroelectronics", Digi-Key_Part_Number=497-11767-ND, Digi-Key_Purchase_URL=https://www.digikey.com/product-detail/en/stmicroelectronics/STM32F405RGT6/497-11767-ND/2754208?utm_source=snapeda&utm_medium=aggregator&utm_campaign=symbol, MF=STMicroelectronics, MP=STM32F405RGT6, SnapEDA_Link=https://www.snapeda.com/parts/STM32F405RGT6/STMicroelectronics/view-part/105502/?ref=snap
U3: "Accelerometer, Gyroscope, 6 Axis Sensor I2C, SPI Output", Package="QFN-24 TDK InvenSense", Availability=Unavailable, MF="TDK InvenSense", MP=MPU-6000, Price=None, SnapEDA_Link=https://www.snapeda.com/parts/MPU-6000/TDK%20InvenSense/view-part/43945/?ref=snap
Y1: "8MHz Ceramic Resonator Built in Capacitor 10pF Â±0.2% -20Â°C ~ 80Â°C Surface Mount", Package="Surface Mount Murata Electronics North America", Availability=Bad, Check_prices=https://www.snapeda.com/parts/CSTCE8M00G52-R0/Murata%20Electronics%20North%20America/view-part/234504/?ref=eda, MF=Murata, MP=CSTCE8M00G52-R0, Price=None, SnapEDA_Link=https://www.snapeda.com/parts/CSTCE8M00G52-R0/Murata%20Electronics%20North%20America/view-part/234504/?ref=snap

## Free pads (board coordinates)
  rect 1.2x1.2 smd: ""(1.19,17.688) ""(1.2,13.2) ""(1.2,14.7) ""(1.2,16.2) ""(1.2,20.9) ""(1.2,22.4) ""(1.2,23.9) ""(17.5,40.3) ""(19.2,40.3) ""(22.2,1.3) ""(22.2,40.3) ""(23.7,1.3) ""(23.7,40.3) ""(25.5,1.3) ""(27,1.3) ""(27.6,40.3) ""(29.1,40.3) ""(33.1,1.3) ""(34.6,1.3) ""(36.1,1.3)
  round 2 hole 2 mask+0.102: ""(1.25,1.25) ""(1.25,40.25) ""(43,1.25) ""(43,40.25)

## Via types
v1: diameter 0.6, hole 0.35, Top Layer to Bottom Layer, tented both sides, 34 vias
v2: diameter 0.6, hole 0.35, Top Layer to Bottom Layer, 24 vias

## Nets (pads, with @x,y where several pads share a name; then routed paths per layer and width w, separated by ;. In a path a pad name is that pad's centre, name@x,y a point inside that pad or via, vN(x,y) a via of type N, cw(c..) or ccw(c..) an arc to the next point about the centre after c; other vN are vias at no path point)
+3.3V: C2.2 C3.2 C4.2 C7.2 C8.2 C9.2 C10.2 C11.2 C12.2 C13.2 C14.2 C15.2 C16.2 D1.2 R2.2 R9.2 R10.2 R11.2 S1.3 S1.4 U1.2 U1.4 U2.1 U2.13 U2.19 U2.32 U2.48 U2.64 U3.13 | length 172.9
  Top Layer w0.254: 17.492,20.59 17.576,20.674
  Top Layer w0.279: C7.2@3.035,20.185 C8.2@4.813,20.185 5.298,20.185 6,20.887 U2.13@7.969,20.887 7.976,20.88 8.711,20.88 8.724,20.867 9.633,20.867 ; v1(5.5,14) 6.112,14.612 6.703,14.612 C11.2@6.988,14.897 C12.2@8.766,14.897 8.942,15.073 9.41,15.073 10.976,16.639 U2.19@10.976,17.38 ; U2.1@7.969,26.887 8.351,26.887 8.361,26.897 8.361,27.279 8.969,27.887 ; v1(9.4,11) R9.2@9.4,9.75 R11.2@12.1,9.75 v1(12.1,11) ; 9.844,27.012 8.969,27.887 ; C4.2@10.775,1.375 10.948,1.548 10.948,2.038 11.713,2.803 U3.13@11.713,3.184 ; C4.2@10.9,1.25 10.95,1.2 18.951,1.2 19.1,1.349 19.1,8.25 17.65,9.7 R10.2@17.65,9.75 17.65,10.556 17.456,10.75 16.75,10.75 v1(16.625,10.875) ; 10.949,19.551 10.949,18.142 10.962,18.129 10.962,17.394 U2.19@10.969,17.387 ; S1.4@14.1,40 S1.3@6.9,40 6.8,40 4.6,37.8 4.6,32.936 6.376,31.16 6.393,31.16 6.938,30.615 C9.2@6.988,30.615 C10.2@8.766,30.615 9.543,30.615 9.969,30.189 U2.64@9.969,28.887 9.969,28.505 9.959,28.495 9.577,28.495 8.969,27.887 ; U2.32@17.469,17.387 17.469,16.937 19.721,14.685 19.965,14.685 C14.2@20.245,14.405 ; U2.32@17.479,17.5 17.479,19.229 ; C15.2@18.545,30.615 C16.2@20.323,30.615 C3.2@22.051,30.615 ; U2.48@19.469,26.887 19.476,26.88 20.256,26.88 21.753,28.377 21.753,30.317 C3.2@22.051,30.615 ; C14.2@20.25,14.4 C13.2@22.028,14.4 22.014,14.414 v1(22.014,16) ; U1.4@30.4,6.564 U1.2@30.4,12.364 30.4,12.939 31.3,13.839 31.3,15.45 C2.2@31.35,15.5 ; v1(30.5,20.5) 31.4,20.5 32.7,19.2 D1.2@32.5,19 32.418,18.918 32.418,17.918 31.25,16.75 31.25,15.555 C2.2@31.305,15.5 ; R2.2@36.15,28.5 36.1,28.55 36.1,29.8 34.3,29.8 32.5,28 28.383,28 27.078,29.305 23.461,29.305 22.151,30.615 C3.2@22.051,30.615
  Top Layer w0.508: 9.633,20.867 10.949,19.551 11.416,19.551 15.058,23.192 ; 9.844,27.012 13.664,23.192 14.878,23.192 ; 17.479,19.229 17.492,19.242 17.492,20.59 ; 17.576,20.674 15.058,23.192 ; 20.258,26.994 19.469,26.994 18.68,26.994 14.878,23.192 ; 14.878,23.192 15.058,23.192
  Bottom Layer w0.279: v1(5.5,14) 5.5,11 6.5,10 8.4,10 v1(9.4,11) ; v1(12.1,11) 12.773,10.327 15.077,10.327 15.625,10.875 v1(16.625,10.875) ; v1(22.014,16) 27.9,16 30.5,18.6 v1(30.5,20.5)
+5V: D2.1 pad.@27,1.3 R4.2 | length 24.6
  Top Layer w0.279: D2.1@24.24,13.2 D2.1@24.25,13.21 ; D2.1@24.25,13.119 D2.1@24.25,13.21 ; v1(25.75,13.25) 24.29,13.25 D2.1@24.25,13.21 ; R4.2@25.9,23 25.9,21.87 24.25,20.22 D2.1@24.25,13.21 ; pad.@27,1.3 v1(27,2.7)
  Bottom Layer w0.279: v1(25.75,13.25) 25.75,3.95 v1(27,2.7)
+5V_USB: D2.2 D3.1 J1.1 R12.2 | length 49.4
  Top Layer w0.279: R12.2@21.75,7.85 21.604,7.704 R12.2@21.604,7.5 ; D2.2@24.24,11.3 24.29,11.25 25.25,11.25 26.5,10 26.5,6.649 26.351,6.5 24.9,6.5 24.318,7.082 22.168,7.082 21.75,7.5 R12.2@21.604,7.5 ; J1.1@39.977,22.73 39.957,22.75 38,22.75 37.318,22.068 D3.1@37.318,20.722 35.798,20.722 35.5,20.424 35.5,4.649 35.351,4.5 24.25,4.5 21.604,7.146 R12.2@21.604,7.5
CURRENT_PAD: pad.@1.2,20.9 U2.11 | length 7.2
  Top Layer w0.279: pad.@1.2,20.9 1.66,21.36 1.727,21.36 1.824,21.457 2.207,21.457 2.637,21.887 U2.11@7.969,21.887
D+: R2.1 R3.1 U2.45 | length 20.1
  Top Layer w0.254: U2.45@19.469,25.387 23.354,25.387 23.358,25.391 30.235,25.391 31.622,24.004 34.046,24.004 34.195,24.153 34.195,25.062 34.388,25.255 34.405,25.255 34.95,25.8 R3.1@35,25.8 35,28.35 R2.1@34.85,28.5
D-: R1.1 U2.44 | length 17.4
  Top Layer w0.254: U2.44@19.469,24.887 19.477,24.879 23.564,24.879 23.568,24.883 30.025,24.883 31.412,23.496 34.046,23.496 34.195,23.347 34.195,22.438 34.388,22.245 34.405,22.245 34.95,21.7 R1.1@35,21.7
GND: C1.1 C2.1 C3.1 C4.1 C5.2 C6.1 C7.1 C8.1 C9.1 C10.1 C11.1 C12.1 C13.1 C14.1 C15.1 C16.1 C17.1 C18.1 D3.2 D4.1 D5.1 J1.5 J1.S1 J1.S2 J1.S3 J1.S4 J1.S5 J1.S6 pad.@23.7,40.3 pad.@25.5,1.3 Q1.2 R8.1 R13.1 U1.1 U2.12 U2.18 U2.63 U3.1 U3.11 U3.18 Y1.2 | length 2.4
  Top Layer w0.279: v2(13.25,8.5) 13.289,8.5 13.574,8.215 14.103,8.215 14.267,8.052 U3.1@14.267,7.336
  Bottom Layer w0.279: 16.913,8.5 17.125,8.5 v2(17.326,8.7)
  other v2: 9,2.5 10,2.5 14.5,3 15.5,3 16.5,3 10.55,3.125 9,3.25 17.325,8.05 7.75,13.25 9.5,13.25 9,18.5 10,19 9.25,21.75 10.25,21.75 11.25,21.75 26,27.5 26.75,27.5 26,28.5 26.75,28.5 26,30.25 27.25,30.25 28.75,30.25
GYRO_CS: R9.1 U2.20 U3.8 | length 14.2
  Top Layer w0.279: v1(8,11) 8,8.398 8.068,8.33 10.365,6.032 U3.8@10.888,6.032 ; v1@10.7,15.3 10.7,15.4 11.462,16.162 11.462,17.38 U2.20@11.469,17.387
  Bottom Layer w0.279: v1(8,11) 8.231,11 10.7,13.469 v1(10.7,15.091)
GYRO_INT: U2.24 U3.12 | length 25.1
  Top Layer w0.279: v1(9.542,4.113) 9.585,4.113 9.715,3.983 U3.12@10.888,3.983 ; U2.24@13.469,17.387 13.489,17.367 13.489,13.811 v1(13.9,13.4)
  Bottom Layer w0.279: v1(9.542,4.113) 15.863,4.113 18.75,7 18.75,9.75 15.1,13.4 v1(13.9,13.4)
GYRO_SCL: R10.1 U2.21 U3.23 | length 15
  Top Layer w0.279: v1@11.768,15.341 11.768,15.434 11.962,15.628 11.962,16.927 11.969,16.934 U2.21@11.969,17.387 ; v1(14.729,11.021) 15.248,11.021 16.319,9.95 R10.1@16.35,9.95 ; U3.23@15.092,6.032 15.615,6.032 16.35,6.768 R10.1@16.35,9.75 ; R10.1@16.35,9.75 16.25,9.85 R10.1@16.35,9.95 ; R10.1@16.35,9.75 R10.1@16.35,9.95
  Bottom Layer w0.279: v1(11.768,15.091) 11.768,13.232 13.959,11.041 14.709,11.041 v1(14.729,11.021)
GYRO_SDA: R11.1 U2.23 U3.24 | length 12.6
  Top Layer w0.279: U2.23@12.969,17.387 12.949,17.367 12.949,16.65 12.919,16.62 12.919,15.568 12.919,14.614 12.919,10.281 13.4,9.8 R11.1@13.4,9.75 ; R11.1@13.5,9.75 14.928,9.75 15.092,9.586 U3.24@15.092,6.537
GYRO_SDO: U2.22 U3.9 | length 18.5
  Top Layer w0.279: U3.9@10.888,5.527 10.223,5.527 6.5,9.251 6.5,11.25 7.25,12 10.5,12 12.449,13.949 12.449,14.791 12.462,14.803 12.462,15.378 12.449,15.391 12.449,17.367 U2.22@12.469,17.387
LED: U2.14 | length 0
  Top Layer w0.279: U2.14@7.949,20.367 U2.14@7.969,20.387
LED_1: R6.2 U2.56 | length 21.4
  Top Layer w0.279: U2.56@13.969,28.887 13.989,28.907 13.989,29.624 17.165,32.8 17.2,32.8 17.6,33.2 22.8,33.2 24.802,31.198 31.952,31.198 R6.2@32.25,30.9
LED_2: R7.2 U2.57 | length 22.1
  Top Layer w0.279: U2.57@13.469,28.887 13.489,28.907 13.489,30.242 17.047,33.8 23.6,33.8 24.8,32.6 R7.2@32.25,32.6
NetC1_2: C1.2 D1.1 D2.3 U1.3 | length 9.4
  Top Layer w0.279: D2.3@26.26,12.25 27.986,12.25 U1.3@28.1,12.364 C1.2@28.1,15.5 28.1,18.6 D1.1@28.5,19 ; D1.1@28,19 D1.1@28.512,19.512
NetC5_1: C5.1 U3.10 | length 2.7
  Top Layer w0.279: C5.1@8.378,5.372 9.705,5.372 10.084,4.992 U3.10@10.888,4.992
NetC6_2: C6.2 U3.20 | length 2.3
  Top Layer w0.279: U3.20@15.092,4.49 15.716,4.49 16.057,4.15 C6.2@17.25,4.15
NetC17_2: C17.2 U2.31 | length 3.7
  Top Layer w0.279: U2.31@16.969,17.387 16.976,17.38 16.976,16.645 17.177,16.444 17.186,16.444 18.526,15.104 18.526,14.454 C17.2@18.472,14.4
NetC18_2: C18.2 U2.47 | length 5.3
  Top Layer w0.279: U2.47@19.469,26.387 21.78,26.387 22.662,27.269 22.669,27.269 23.85,28.45 C18.2@23.85,28.5
NetD4_2: D4.2 R6.1 | length 2.4
  Top Layer w0.279: D4.2@30.05,30.1 30.252,29.898 31.952,29.898 R6.1@32.25,29.6
NetD5_2: D5.2 R7.1 | length 2.3
  Top Layer w0.279: D5.2@30.05,33.7 32.05,33.7 R7.1@32.25,33.9
NetQ1_1: Q1.1 R5.2 | length 2.1
  Top Layer w0.279: R5.2@22.25,36.35 24.19,36.35 Q1.1@24.3,36.24
NetR8_2: R8.2 S1.1 S1.2 U2.60 | length 16.2
  Top Layer w0.279: S1.1@6.9,37 S1.2@14.1,37 14.1,35.114 R8.2@14.115,35.099 14.115,34.115 11.989,31.989 11.989,28.907 U2.60@11.969,28.887
NetR12_1: R12.1 R13.2 U2.25 | length 14.6
  Top Layer w0.254: U2.25@13.969,17.387 13.989,17.367 13.989,15.761 14.182,15.568 v1(14.182,14.99) ; v1(20.694,9.25) 21.65,9.25 R12.1@21.75,9.15 R13.2@23.5,9.15
  Bottom Layer w0.254: v1(14.182,14.99) 14.374,15.182 15.183,15.182 15.689,14.676 15.689,14.413 16.096,14.006 20.47,9.632 20.47,9.567 20.694,9.344 v1(20.694,9.25)
NetR14_2: R14.2 U2.58 | length 10.3
  Top Layer w0.279: U2.58@12.969,28.887 12.989,28.907 12.989,30.389 18.902,36.302 19.2,36.6 R14.2@19.25,36.6
NetR15_2: R15.2 U2.59 | length 9.8
  Top Layer w0.279: U2.59@12.469,28.887 12.489,28.907 12.489,30.989 17.443,35.943 17.443,36.543 R15.2@17.5,36.6
NetU2_5: U2.5 Y1.1 | length 5.3
  Top Layer w0.279: Y1.1@3.195,26.1 4.8,26.1 4.8,26.098 4.858,26.04 4.86,26.04 6.017,24.883 7.965,24.883 U2.5@7.969,24.887
NetU2_6: U2.6 Y1.3 | length 4.8
  Top Layer w0.279: Y1.3@3.5,23.7 5.418,23.7 6.111,24.393 7.963,24.393 U2.6@7.969,24.387
PPM_IN: pad.@36.1,1.3 U2.40 | length 37.6
  Top Layer w0.279: U2.40@19.469,22.887 19.473,22.883 21.669,22.883 v1(21.7,22.852) ; pad.@36.1,1.3 36.2,1.4 v1(36.2,2.8)
  Bottom Layer w0.279: v1(21.7,22.852) 21.846,22.706 34.794,22.706 36.2,21.3 v1(36.2,2.8) v1@36.2,3
RSII_PAD: pad.@1.2,22.4 U2.10 | length 6.8
  Top Layer w0.279: pad.@1.2,22.4 1.213,22.387 U2.10@7.969,22.387
S1: pad.@1.2,13.2 U2.17 | length 10.9
  Top Layer w0.279: pad.@1.2,13.2 3.281,13.2 6.306,16.225 6.306,16.287 7.649,17.63 9.959,17.63 9.969,17.619 U2.17@9.969,17.387
S2: pad.@1.2,14.7 U2.26 | length 46.2
  Top Layer w0.279: pad.@1.2,14.7 1.282,14.618 v1(3.718,14.618) ; U2.26@14.469,17.387 14.489,17.367 14.489,15.89 14.901,15.478 v1(14.901,14.501)
  Bottom Layer w0.279: v1(3.718,14.618) 3.718,5.032 7.25,1.5 16.75,1.5 20,4.75 20,9.401 v1(14.901,14.501)
S3: pad.@1.2,16.2 U2.27 | length 55.3
  Top Layer w0.279: pad.@1.2,16.2 1.3,16.1 v1(4.9,16.1) ; U2.27@14.969,17.387 14.969,16.056 15.457,15.568 15.457,15.243 15.871,14.829 16.235,14.829 v1(16.388,14.677)
  Bottom Layer w0.279: v1(4.9,16.1) 4.897,16.103 4.448,16.103 4.151,16.4 3.049,16.4 2.9,16.251 2.9,4.35 6.5,0.75 17,0.75 21.387,5.137 21.387,10.613 17.5,14.5 16.551,14.5 16.388,14.664 v1(16.388,14.677)
S4: pad.@1.19,17.688 U2.16 | length 7.6
  Top Layer w0.279: pad.@1.19,17.688 1.278,17.6 5.147,17.6 6.911,19.364 7.946,19.364 U2.16@7.969,19.387 U2.16@7.949,19.407
SBUS: pad.@22.2,40.3 R5.1 | length 2.7
  Top Layer w0.279: pad.@22.2,40.3 22.2,37.7 R5.1@22.25,37.65
SCL_PAD: pad.@19.2,40.3 R14.1 | length 2.4
  Top Layer w0.279: pad.@19.2,40.3 19.2,37.95 R14.1@19.25,37.9
SDA_PAD: pad.@17.5,40.3 R15.1 | length 2.4
  Top Layer w0.279: R15.1@17.5,37.9 pad.@17.5,40.3
UART1_RX: pad.@27.6,40.3 Q1.3 R4.1 U2.43 | length 26.7
  Top Layer w0.279: U2.43@19.489,24.367 U2.43@19.469,24.387 23.663,24.387 24.302,23.748 24.352,23.748 24.65,23.45 R4.1@24.65,23.4 24.618,23.432 23.132,23.432 v1(23.1,23.4) ; v1(25.2,34.8) Q1.3@25.2,38.09 ; Q1.3@25.25,38.26 25.25,38.36 25.423,38.533 26.933,38.533 27.6,39.2 pad.@27.6,40.3
  Bottom Layer w0.279: v1(23.1,23.4) 25.2,25.5 v1(25.2,34.8)
UART1_TX: pad.@29.1,40.3 U2.42 | length 23
  Top Layer w0.279: U2.42@19.471,23.889 19.475,23.893 20.216,23.893 20.403,23.706 v1(21.7,23.706) ; v1(29.1,39) 29.1,40.1 29.2,40.2 pad.@29.1,40.3
  Bottom Layer w0.279: v1@21.7,23.678 21.7,23.9 21.7,33.2 27.5,39 v1(29.1,39)
UART3_RX: pad.@22.2,1.3 U2.30 | length 18.6
  Top Layer w0.279: U2.30@16.469,17.387 16.471,17.385 16.471,16.191 17.038,15.625 v1(17.038,15.538) ; pad.@22.2,1.2 pad.@22.2,1.3 v1(22.2,2.6)
  Bottom Layer w0.279: v1(17.038,15.538) 17.144,15.538 22,10.682 22,2.887 22.2,2.687 v1(22.2,2.6)
UART3_TX: pad.@23.7,1.3 U2.29 | length 22.3
  Top Layer w0.279: U2.29@15.969,17.387 15.989,17.367 15.989,15.693 v1(16.151,15.531) ; pad.@23.7,1.3 v1(23.7,2.5)
  Bottom Layer w0.279: v1(16.151,15.531) 16.151,16.068 16.315,16.232 19.068,16.232 23.8,11.5 v1@23.8,2.5
UART6_RX: pad.@34.6,1.3 U2.38 | length 36.2
  Top Layer w0.279: U2.38@19.469,21.887 19.489,21.867 21.667,21.867 v1@21.684,21.884 ; pad.@34.6,1.3 v1(34.6,2.8)
  Bottom Layer w0.279: v1(21.601,21.988) 34.012,21.988 35.3,20.7 35.3,3.5 v1(34.6,2.8)
UART6_TX: pad.@33.1,1.3 U2.37 | length 35.3
  Top Layer w0.279: U2.37@19.469,21.387 19.471,21.385 21.219,21.385 21.604,21 v1(21.7,21) ; pad.@33.1,1.3 v1(33.1,2.8)
  Bottom Layer w0.279: v1(21.7,21) 21.779,21 22.26,21.481 33.319,21.481 34.3,20.5 34.3,4 v1(33.1,2.8)
USB_N: J1.2 R1.2 | length 5.3
  Top Layer w0.254: R1.2@35,23 35.05,23 35.348,23.298 35.348,23.347 35.497,23.496 35.973,23.496 36.09,23.38 J1.2@39.977,23.38
USB_P: J1.3 R3.2 | length 5.3
  Top Layer w0.254: R3.2@35,24.5 35.05,24.5 35.348,24.202 35.348,24.153 35.497,24.004 36.184,24.004 36.229,23.959 39.906,23.959 J1.3@39.977,24.03
VBAT_PAD: pad.@1.2,23.9 U2.9 | length 7.2
  Top Layer w0.279: pad.@1.2,23.9 1.349,23.751 2.149,23.751 2.993,22.907 7.949,22.907 U2.9@7.969,22.887